# Altium PCB main_robot_mpu.PcbDoc
Units mil, origin at the board's own origin, x right, y up, seen from the top; angles counter-clockwise.
Board outline 2215 x 1568 mil, 2 copper layers (Top Layer, Bottom Layer); 88 components, 90 nets, 351 pads, 92 vias.
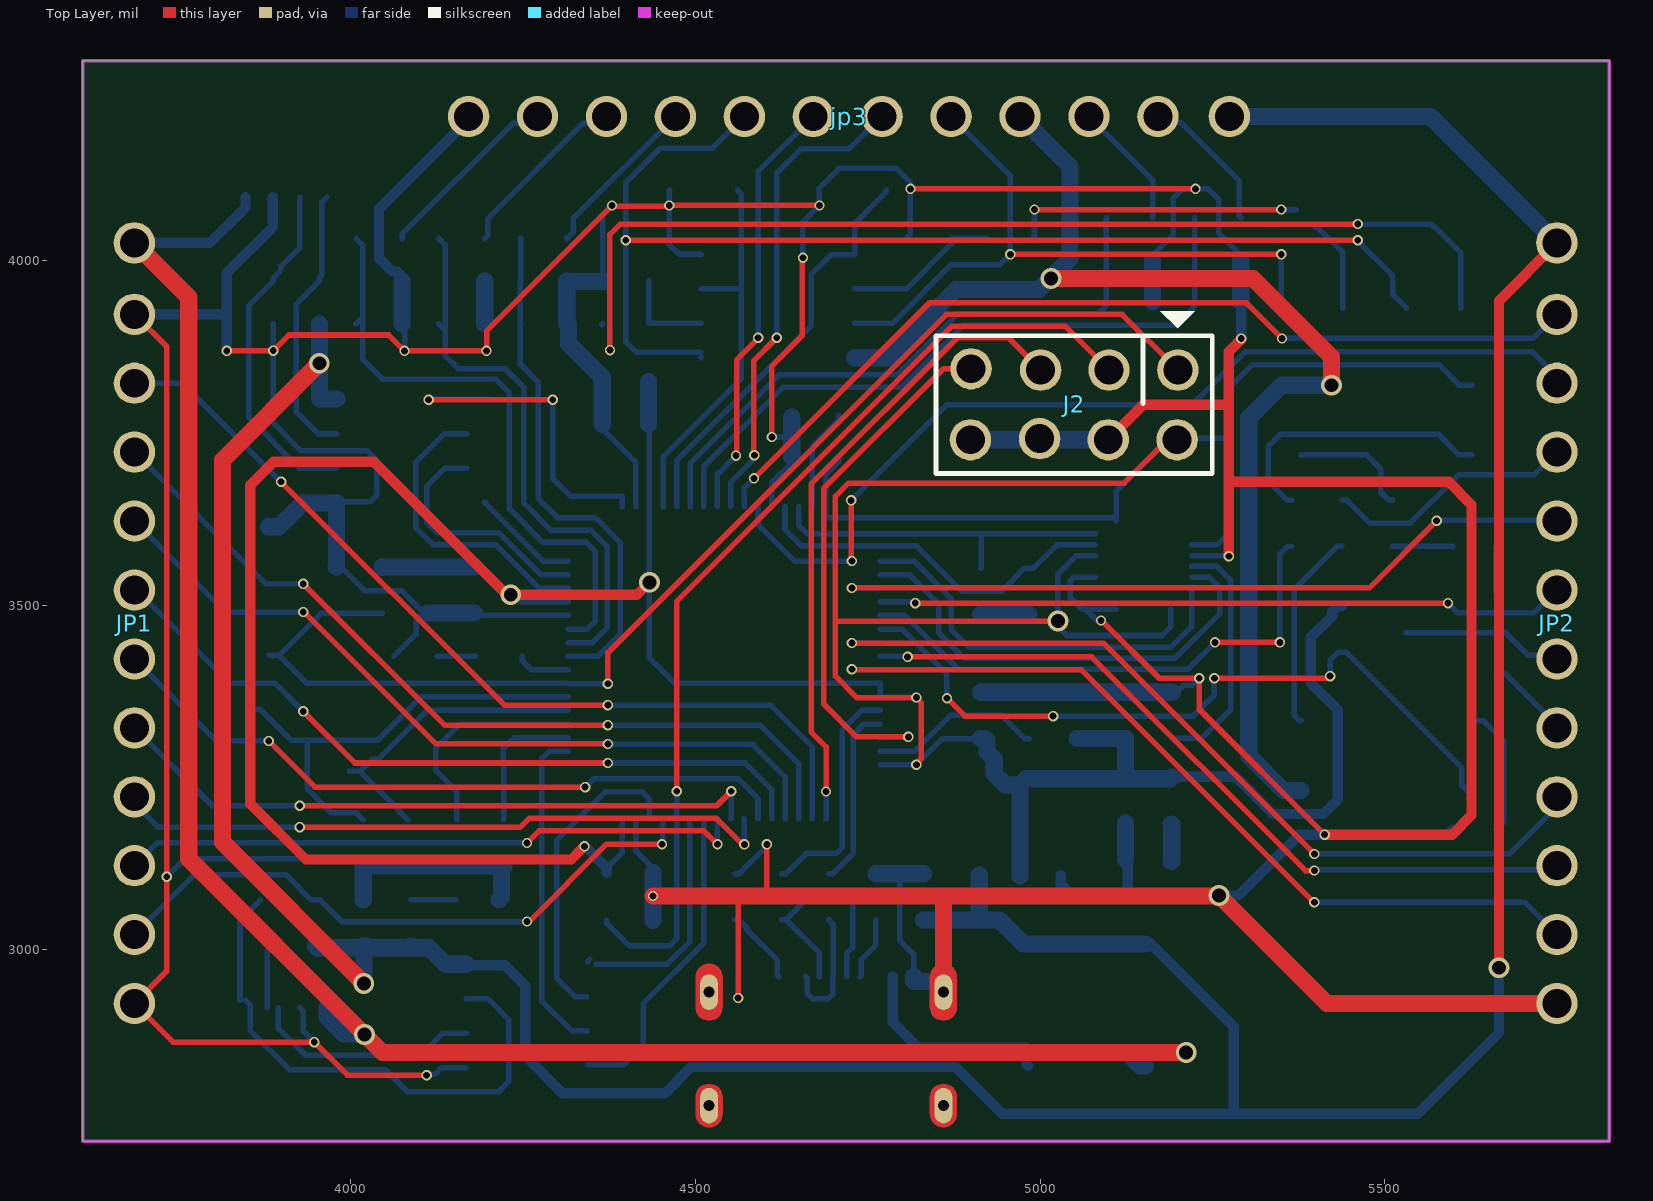
[diagram p0: Top Layer view]
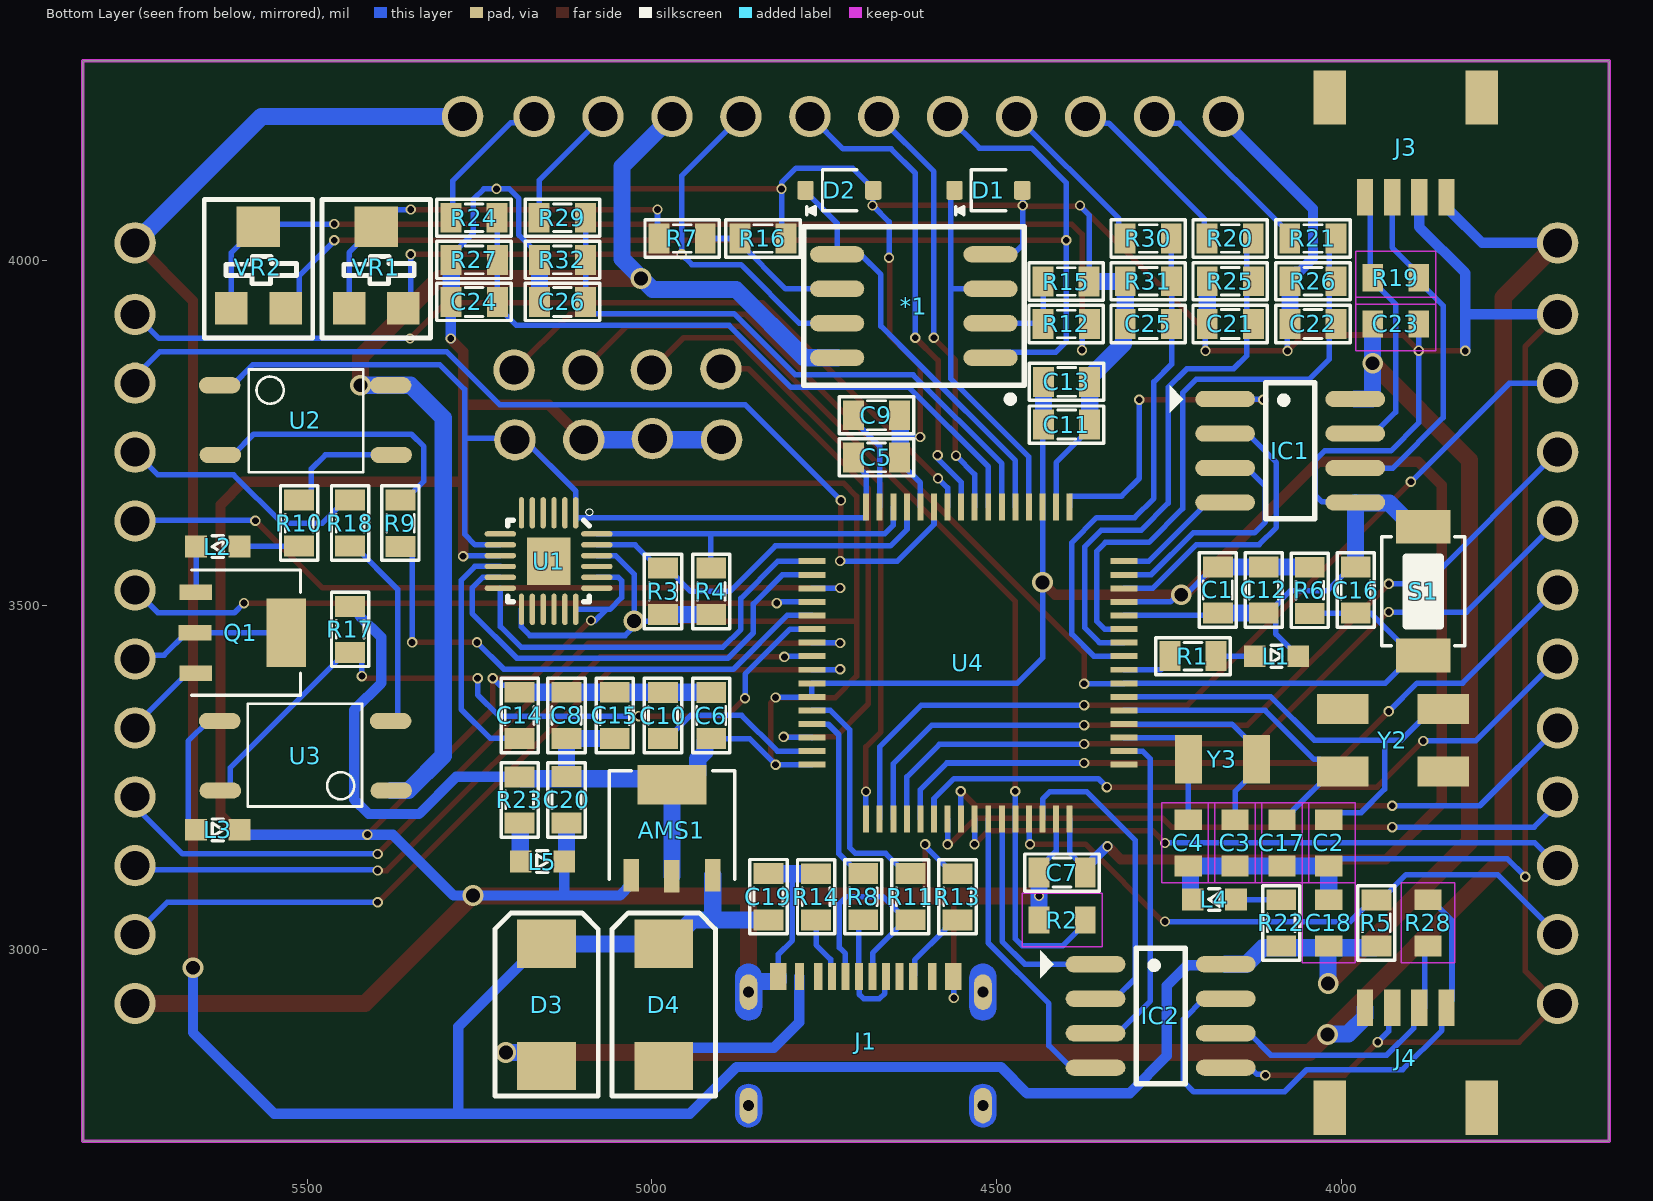
[diagram p1: Bottom Layer view, seen from below]
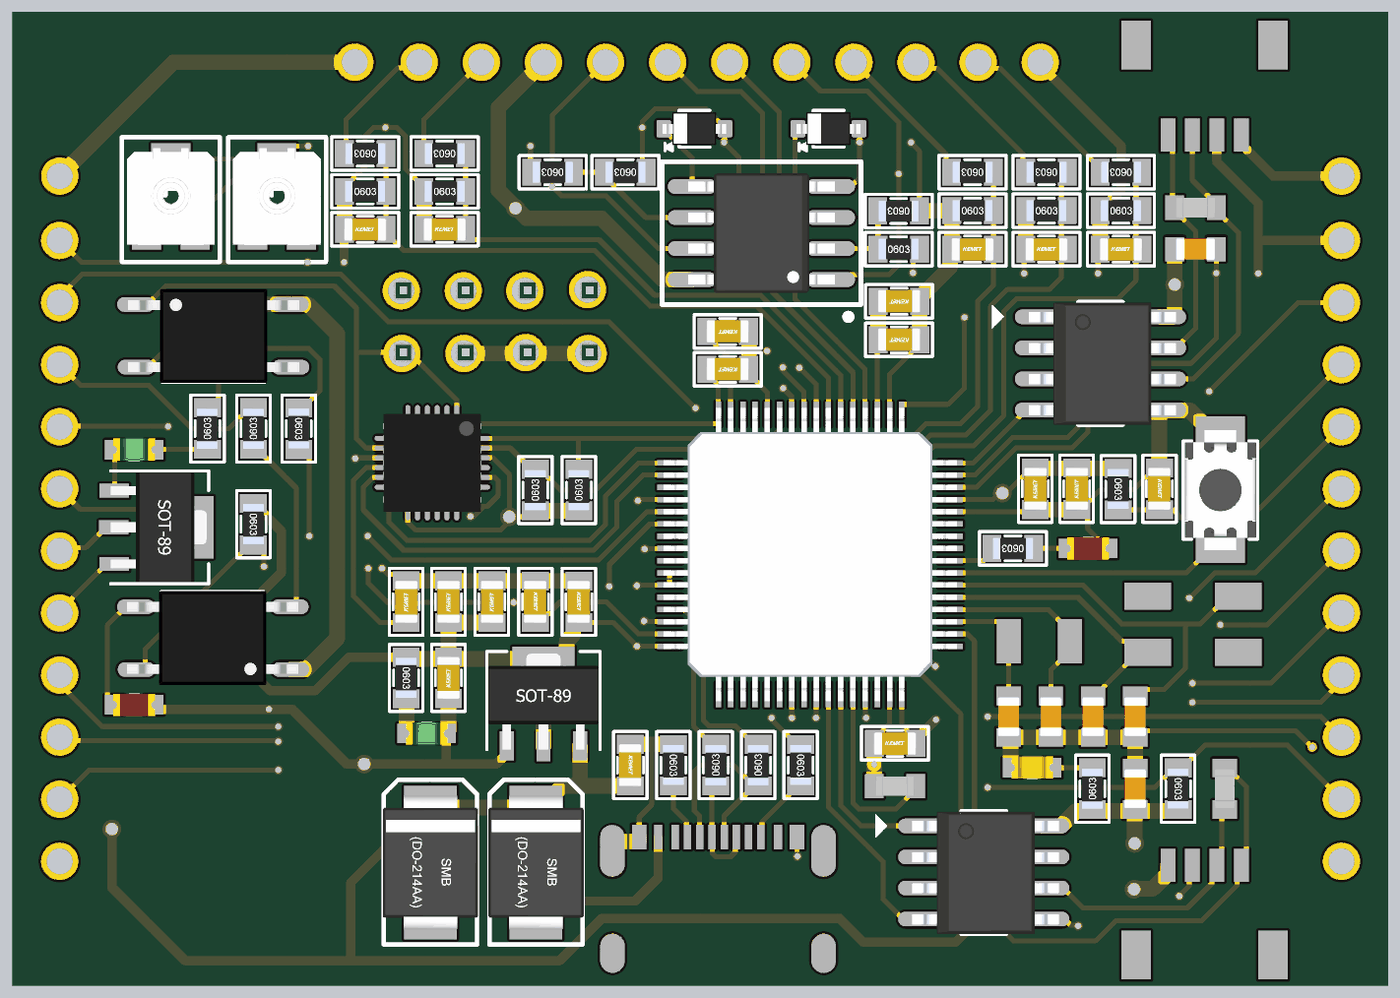
[diagram p2: 3D render of the assembled board from below, using the file's embedded part models]

## Layer stack, top to bottom
Top Solder: solder mask 0.4, Solder Resist, Dk 3.5
Top Layer: signal copper 1.4
Dielectric 1: dielectric 12.6, FR-4, Dk 4.8
Bottom Layer: signal copper 1.4
Bottom Solder: solder mask 0.4, Solder Resist, Dk 3.5

## Board outline
3611,2722 3611,4290 5826,4290 5826,2722

## Design rules (kind name [scope] priority, off if disabled: settings)
Clearance [All] p1: gap=7 ignorepadtopadclearanceinfootprint=FALSE
PolygonConnect [All] p1: connectstyle=Relief reliefconductorwidth=10 reliefentries=4 polygonreliefangle="90 Angle" airgapwidth=10
RoomDefinition main_robot_mpu [InComponentClass('main_robot_mpu')] p1: confinementstyle=ConfineIn formatcopy=TRUE lockcomponents=FALSE outline 0,0 2000,0 2000,1000 0,1000
RoutingVias [All] p1: holewidth=10 width=15 viastyle="Through Hole" minholewidth=10 minwidth=15 maxholewidth=10 maxwidth=15
SolderMaskExpansion [All] p1: expansion=4 istentingtop=FALSE
Width [All] p1: maxlimit=25 minlimit=8 preferedwidth=15
30 further rules are at their usual default settings.

## Components (designator, comment, footprint, x,y, rotation, side; value= is the part's Value field where it differs from the comment)
*1 "LM2904D" "SOIC 8" 4620,3934 r0 bottom
AMS1 "AMS1117" SOT89 4966,3185 r180 bottom
C1 "0.1uF" CAP_SMD0603 4177,3521 r90 bottom
C2 "22pF" 0603-CAP 4018,3155 r90 bottom
C3 "15pF" 0603-CAP 4154,3155 r90 bottom
C4 "15pF" 0603-CAP 4222,3155 r90 bottom
C5 "0.1uF" CAP_SMD0603 4673.29,3716.45 r0 bottom
C6 "0.1uF" CAP_SMD0603 4916,3341 r270 bottom
C7 "0.1uF" CAP_SMD0603 4406,3110 r180 bottom
C8 "0.1uF" CAP_SMD0603 5122,3339 r90 bottom
C9 "2.2uF" CAP_SMD0603 4673.29,3777.45 r0 bottom
C10 "2.2uF" CAP_SMD0603 4986,3341 r270 bottom
C11 "0.1uF" CAP_SMD0603 4397.3,3764 r0 bottom
C12 "0.1uF" CAP_SMD0603 4110.33,3521 r90 bottom
C13 "0.1uF" CAP_SMD0603 4397.3,3826 r0 bottom
C14 "0.1uF" CAP_SMD0603 5190,3339 r90 bottom
C15 "0.1uF" CAP_SMD0603 5052,3339 r90 bottom
C16 "0.1uF" CAP_SMD0603 3981,3523 r270 bottom
C17 "22pF" 0603-CAP 4086,3155 r90 bottom
C18 "0.1uF" 0603-CAP 4018,3039 r270 bottom
C19 "0.1uF" CAP_SMD0603 4833,3078 r270 bottom
C20 "0.1uF" CAP_SMD0603 5122,3216.49 r90 bottom
C21 "0.1uF" CAP_SMD0603 4162,3906 r180 bottom
C22 "0.1uF" CAP_SMD0603 4042,3906 r180 bottom
C23 "0.1uF" 0603-CAP 3921,3908 r0 bottom
C24 "0.1uF" CAP_SMD0603 5259,3938 r180 bottom
C25 "0.1uF" CAP_SMD0603 4281,3906 r180 bottom
C26 "0.1uF" CAP_SMD0603 5131,3938 r180 bottom
D1 "3.3V" SOD323 4512,4102 r180 bottom
D2 "3.3V" SOD323 4728,4102 r180 bottom
D3 "SS54" SMB 5153,2920 r90 bottom
D4 "SS54" SMB 4983,2920 r90 bottom
IC1 "MAX485" SO-8 4074,3724 r180 bottom
IC2 "MAX485" SO-8 4262,2904 r180 bottom
J1 "USB_C_2-LAYER_PADS" USB-C-16P-2LAYER-PADS 4689.83,2974.54 r180 bottom
J2 "Connector 4x2" JP4x2 5049.5,3791.5 r180 top
J3 "QWIIC_RA" JST04_1MM_RA 3906.31,4092 r0 bottom
J4 "QWIIC_RA" JST04_1MM_RA 3906.31,2915.69 r180 bottom
JP1 "jumper 12p 2.54mm" "jumper 12p 2.54mm" 3686,3822 r270 top (schematic designator jp1)
JP2 "jumper 12p 2.54mm" "jumper 12p 2.54mm" 5750,3822 r270 top (schematic designator jp2)
jp3 "jumper 12p 2.54mm" "jumper 12p 2.54mm" 5071,4209 r180 top
L1 "Red" LED_RED_SMD_0603 4094,3426 r180 bottom
L2 "LED" LED_GREEN_SMD_0603 5630,3585 r0 bottom
L3 "LED" LED_RED_SMD_0603 5630,3174 r180 bottom
L4 "Red" LED_YELLOW_SMD_0603 4184,3073 r0 bottom
L5 "Red" LED_GREEN_SMD_0603 5159,3128 r180 bottom
Q1 "D882" SOT89 5585,3455 r270 bottom
R1 "1k" RES_SMD0603 4214,3428 r0 bottom
R2 "10K" 0603-RES 4405,3043 r180 bottom
R3 "4.7k" RES_SMD0603 4982,3519 r90 bottom
R4 "4.7k" RES_SMD0603 4912,3519 r90 bottom
R5 "4k7" RES_SMD0603 3951,3040 r270 bottom
R6 "4.7k" RES_SMD0603 4047.67,3522.63 r270 bottom
R7 "2k" RES_SMD0603 4955.1,4034 r0 bottom
R8 "22" RES_SMD0603 4691.5,3075.95 r90 bottom
R9 "1k" RES_SMD0603 5367,3620 r270 bottom
R10 "4K7" RES_SMD0603 5510,3618 r90 bottom
R11 "22" RES_SMD0603 4623.17,3075.95 r90 bottom
R12 "2k" RES_SMD0603 4400,3906 r180 bottom
R13 "5.1k" RES_SMD0603 4558.83,3077.95 r270 bottom
R14 "5.1k" RES_SMD0603 4763.83,3077.95 r270 bottom
R15 "1k" RES_SMD0603 4398,3971.5 r0 bottom
R16 "1k" RES_SMD0603 4837.97,4034 r0 bottom
R17 "1k" RES_SMD0603 5440,3466 r270 bottom
R18 "4k7" RES_SMD0603 5436,3618 r90 bottom
R19 "120R" 0603-RES 3921,3975 r0 bottom
R20 "2k" RES_SMD0603 4160,4034 r0 bottom
R21 "2k" RES_SMD0603 4040,4034 r0 bottom
R22 "1k" RES_SMD0603 4085,3038 r90 bottom
R23 "1k" RES_SMD0603 5194,3218.49 r270 bottom
R24 "?k" RES_SMD0603 5257,4064 r0 bottom
R25 "1k" RES_SMD0603 4162,3968 r180 bottom
R26 "1k" RES_SMD0603 4042,3968 r180 bottom
R27 "?k" RES_SMD0603 5259,3999 r180 bottom
R28 "120R" 0603-RES 3874,3039 r90 bottom
R29 "2k" RES_SMD0603 5129,4064 r0 bottom
R30 "2k" RES_SMD0603 4279,4034 r0 bottom
R31 "1k" RES_SMD0603 4281,3968 r180 bottom
R32 "1k" RES_SMD0603 5131,3999 r180 bottom
S1 "PTS636_SM43J_SMTR_LFS" BUTTON_3x4 3881,3520 r270 bottom
U1 "MPU-9250" QFN-24 5149,3563 r270 bottom
U2 "OPTO" SOP4 5501,3770 r180 bottom
U3 "OPTO" SOP4 5504.6,3280 r0 bottom
U4 "STM32F405RGT6" TQFP64 4541.62,3416.16 r90 bottom
VR1 "100" "VR - SMD" 5439.37,3930.89 r180 bottom
VR2 "10K" "VR - SMD" 5610.37,3930.89 r180 bottom
Y2 "12MHz" CRYSTAL-SMD-5X3.2-4PAD 3925,3304 r180 bottom
Y3 "32.768kHz" CRYSTAL-SMD-3.2X1.5MM 4172.33,3276.5 r0 bottom

## Footprints (in the part's own frame and the unit in brackets; to place one, negate y for a bottom-side part, rotate by r counter-clockwise, add the part's x,y. Pads: shape width x height; smd on the part's side, far side on the other; paste and mask are expansions set on the pad)
0603-CAP [mil] "0603-CAP"
  rect 30x39.37 smd: 1(-33.46,0) 2(33.46,0)
  Top Layer keep-out lines w2: -57.99,-38.7 57.99,-38.7 57.99,38.7 -57.99,38.7 -57.99,-38.7
  body extent -31,-18 31,18, height 31
0603-RES [mil] "0603-RES"
  rect 30x39.37 smd: 1(-33.46,0) 2(33.46,0)
  Top Layer keep-out lines w2: 57.99,-38.7 57.99,38.7 -57.99,38.7 -57.99,-38.7 57.99,-38.7
  body extent -31,-16 31,16, height 16
BUTTON_3x4 [mm]
  rect 1.25x2 smd: 1(-2.382,0) 2(2.357,0)
  silkscreen extent -2.01,-1.52 2.01,1.52, body extent -2.45,-1.45 2.45,1.45, height 2
CAP_SMD0603 [mm]
  rect 0.771x1.1 smd: 1(-0.822,0.051) 2(0.88,0.051)
  silkscreen extent -1.35,-0.63 1.4,0.74, body extent -0.85,-0.43 0.9,0.52, height 0.88
CRYSTAL-SMD-3.2X1.5MM [mm] "CRYSTAL-SMD-3.2X1.5MM"
  rect 1x1.8 smd: 1(-1.25,0) 2(1.25,0)
CRYSTAL-SMD-5X3.2-4PAD [mil] "CRYSTAL-SMD-5X3.2-4PAD"
  rect 74.8x43.31 smd: 1(-72.83,-45.28) 2(72.83,-45.28) 3(72.83,45.28) 4(-72.83,45.28)
JP4x2 [mil] "Connector 4x2"
  round 60 hole 42: 1(-150.5,-49.5) 2(-50.5,-49.5) 3(48.5,-49.5) 4(149.5,-51.5) 5(-149.5,51.5) 6(-49.5,51.5) 7(50,50) 8(150.5,51.5)
  silkscreen extent -200,-135 200,101, body extent -197,-100 203,100, height 335
JST04_1MM_RA [mm] "JST04_1MM_RA"
  rect 0.6x1.35 smd: 1(-1.5,0) 2(-0.5,0) 3(0.5,0) 4(1.5,0)
  rect 1.2x2 smd: NC1(2.8,-3.675) NC2(-2.8,-3.675)
"jumper 12p 2.54mm" [mil] "jp 12p 2.54mm"
  round 60 hole 42: 1(-203.72,-0.14) 2(-100,0) 3(0,0) 4(100,0) 5(200,0) 6(300,0) 7(400,0) 8(500,0) 9(600,0) 10(700,0) 11(800,0) 12(900,0)
LED_GREEN_SMD_0603 [mm]
  rect 0.8x0.8 smd: 1(-0.8,0) 2(0.8,0)
  silkscreen extent -0.2,-0.4 0.2,0.4, body extent -0.85,-0.45 0.85,0.45, height 0.88
LED_RED_SMD_0603 [mm]
  rect 0.8x0.8 smd: 1(-0.8,0) 2(0.8,0)
  silkscreen extent -0.2,-0.4 0.2,0.4, body extent -0.85,-0.45 0.85,0.45, height 0.88
LED_YELLOW_SMD_0603 [mm]
  rect 0.8x0.8 smd: 1(-0.8,0) 2(0.8,0)
  silkscreen extent -0.2,-0.4 0.2,0.4, body extent -0.85,-0.45 0.85,0.45, height 0.9
QFN-24 [mm]
  oval 1.157x0.2 smd: 1(-1.804,0.975) 2(-1.804,0.575) 3(-1.804,0.175) 4(-1.804,-0.225) 5(-1.804,-0.625) 6(-1.804,-1.025) 13(1.753,-1.025) 14(1.753,-0.625) 15(1.753,-0.225) 16(1.753,0.175) 17(1.753,0.575) 18(1.753,0.975)
  oval 0.2x1.157 smd: 7(-1.025,-1.804) 8(-0.625,-1.804) 9(-0.225,-1.804) 10(0.175,-1.804) 11(0.575,-1.804) 12(0.975,-1.804) 19(0.975,1.753) 20(0.575,1.753) 21(0.175,1.753) 22(-0.225,1.753) 23(-0.625,1.753) 24(-1.025,1.753)
  rect 1.75x1.6 smd: 25(-0.025,-0.025)
  silkscreen extent -1.95,-1.53 1.47,1.6, body extent -2.04,-2.04 1.98,1.98, height 1
RES_SMD0603 [mm]
  rect 0.771x1.1 smd: 1(-0.822,0.051) 2(0.88,0.051)
  silkscreen extent -1.35,-0.64 1.4,0.74, body extent -0.8,-0.37 0.84,0.48, height 0.46
SMB [mil]
  rect 70x85 smd: 1(-88.58,0) 2(88.58,0)
  silkscreen extent -132,-75 134,75, body extent -108,-77 108,77, height 96
SO-8 [mm] "8-Pin Small Outline Integrated Circuit 1.27 mm Pitch, IPC Medium Density"
  oval 2.2x0.6 smd: 1(-2.4,1.905) 2(-2.4,0.635) 3(-2.4,-0.635) 4(-2.4,-1.905) 5(2.4,-1.905) 6(2.4,-0.635) 7(2.4,0.635) 8(2.4,1.905)
  silkscreen extent -4.44,-2.5 0.9,2.5, body extent -2.93,-2.51 3.08,2.49, height 1.75
SOD323 [mm] "SOD-323; 2 Leads; Body 1.8 x 1.35 mm, (LxW)"
  round 0.508 on Mech15: 0(0,0)
  rrect25% 0.6x0.7 smd: A(1.25,0) K(-1.25,0)
  silkscreen extent -1.2,-0.9 0.64,0.75, body extent -1.3,-0.68 1.3,0.67, height 1.1
"SOIC 8" [mm] "SOIC, 8-Leads, Body 4.90x3.90mm, Pitch 1.27mm, IPC Medium Density"
  oval 2x0.6 smd: 1(-2.827,1.905) 2(-2.827,0.635) 3(-2.827,-0.635) 4(-2.827,-1.905) 5(2.827,-1.905) 6(2.827,-0.635) 7(2.827,0.635) 8(2.827,1.905)
  silkscreen extent -4.06,-2.92 4.06,3.55, body extent -3,-2.45 3,2.45, height 1.7
SOP4 [mil] "SOIC, 8-Leads, Body 4.90x3.90mm, Pitch 1.27mm, IPC Medium Density"
  oval 60.24x23.62 smd: 1(-126.3,49) 2(-125.3,-52) 3(122.7,-52) 4(121.7,49)
  silkscreen extent -84,-77 82,72, body extent -139,-78 137,74, height 87
SOT89 [mil]
  rect 22.46x47.24 smd: 1(-64,-77) 2(-5,-78) 3(54,-77)
  rect 100x57.24 smd: 2(-5,54.21)
  silkscreen extent -96,-83 86,75, body extent -94,-83 84,72, height 56
TQFP64 [mm] "TQFP64"
  rect 0.22x1 smd: 1(-3.75,-5.75) 2(-3.25,-5.75) 3(-2.75,-5.75) 4(-2.25,-5.75) 5(-1.75,-5.75) 6(-1.25,-5.75) 7(-0.75,-5.75) 8(-0.25,-5.75) 9(0.25,-5.75) 10(0.75,-5.75) 11(1.25,-5.75) 12(1.75,-5.75) 13(2.25,-5.75) 14(2.75,-5.75) 15(3.25,-5.75) 16(3.75,-5.75) 33(3.75,5.75) 34(3.25,5.75) 35(2.75,5.75) 36(2.25,5.75) 37(1.75,5.75) 38(1.25,5.75) 39(0.75,5.75) 40(0.25,5.75) 41(-0.25,5.75) 42(-0.75,5.75) 43(-1.25,5.75) 44(-1.75,5.75) 45(-2.25,5.75) 46(-2.75,5.75) 47(-3.25,5.75) 48(-3.75,5.75)
  rect 1x0.22 smd: 17(5.75,-3.75) 18(5.75,-3.25) 19(5.75,-2.75) 20(5.75,-2.25) 21(5.75,-1.75) 22(5.75,-1.25) 23(5.75,-0.75) 24(5.75,-0.25) 25(5.75,0.25) 26(5.75,0.75) 27(5.75,1.25) 28(5.75,1.75) 29(5.75,2.25) 30(5.75,2.75) 31(5.75,3.25) 32(5.75,3.75) 49(-5.75,3.75) 50(-5.75,3.25) 51(-5.75,2.75) 52(-5.75,2.25) 53(-5.75,1.75) 54(-5.75,1.25) 55(-5.75,0.75) 56(-5.75,0.25) 57(-5.75,-0.25) 58(-5.75,-0.75) 59(-5.75,-1.25) 60(-5.75,-1.75) 61(-5.75,-2.25) 62(-5.75,-2.75) 63(-5.75,-3.25) 64(-5.75,-3.75)
  body extent -6,-6 6,6, height 1.56
USB-C-16P-2LAYER-PADS [mm] "USB-C-16P-2LAYER-PADS"
  rect 0.3x1 smd: A5(-1.25,-0.34) A6(-0.25,-0.34) A7(0.25,-0.34) A8(1.25,-0.34) B5(1.75,-0.34) B6(0.75,-0.34) B7(-0.75,-0.34) B8(-1.75,-0.34)
  rect 0.6x1 smd: GND(-3.225,-0.34) GND(3.225,-0.34)
  oval 0.654x1.308 / inner oval 0.705x1.41 / far side oval 0.654x1.308 hole 0.4: SHLD1(-4.318,-0.915) SHLD2(4.318,-0.915) SHLD3(-4.318,-5.095) SHLD4(4.318,-5.095)
  rect 0.33x1 smd: VBUS1(-2.45,-0.34) VBUS2(2.45,-0.34)
  Top Layer region: -3.818,-0.365 -3.818,-1.465 -3.856,-1.656 -3.965,-1.819 -4.127,-1.927 -4.318,-1.965 -4.318,-1.965 -4.568,-1.898 -4.751,-1.715 -4.818,-1.465 -4.818,-1.465 -4.818,-0.365 -4.78,-0.174 -4.672,-0.011 -4.509,0.097 -4.318,0.135 -4.318,0.135 -4.127,0.097 -3.964,-0.011 -3.856,-0.174 -3.818,-0.365
  Top Layer region: 4.818,-0.365 4.818,-1.465 4.78,-1.656 4.672,-1.819 4.509,-1.927 4.318,-1.965 4.318,-1.965 4.127,-1.927 3.965,-1.819 3.856,-1.656 3.818,-1.465 3.818,-1.465 3.818,-0.365 3.856,-0.174 3.964,-0.011 4.127,0.097 4.318,0.135 4.318,0.135 4.509,0.097 4.672,-0.011 4.78,-0.174 4.818,-0.365
  Top Layer region: -4.318,-5.895 -4.509,-5.857 -4.672,-5.749 -4.78,-5.586 -4.818,-5.395 -4.818,-5.395 -4.818,-4.795 -4.78,-4.604 -4.672,-4.441 -4.509,-4.333 -4.318,-4.295 -4.318,-4.295 -4.127,-4.333 -3.964,-4.441 -3.856,-4.604 -3.818,-4.795 -3.818,-4.795 -3.818,-5.395 -3.856,-5.586 -3.964,-5.749 -4.127,-5.857 -4.318,-5.895
  Top Layer region: 4.818,-4.795 4.818,-5.395 4.78,-5.586 4.672,-5.749 4.509,-5.857 4.318,-5.895 4.318,-5.895 4.127,-5.857 3.964,-5.749 3.856,-5.586 3.818,-5.395 3.818,-5.395 3.818,-4.795 3.856,-4.604 3.964,-4.441 4.127,-4.333 4.318,-4.295 4.318,-4.295 4.509,-4.333 4.672,-4.441 4.78,-4.604 4.818,-4.795
  Bottom Layer region: -4.818,-0.365 -4.818,-1.465 -4.751,-1.715 -4.568,-1.898 -4.318,-1.965 -4.318,-1.965 -4.127,-1.927 -3.965,-1.819 -3.856,-1.656 -3.818,-1.465 -3.818,-1.465 -3.818,-0.365 -3.856,-0.174 -3.964,-0.011 -4.127,0.097 -4.318,0.135 -4.318,0.135 -4.509,0.097 -4.672,-0.011 -4.78,-0.174 -4.818,-0.365
  Bottom Layer region: 3.818,-0.365 3.818,-1.465 3.856,-1.656 3.965,-1.819 4.127,-1.927 4.318,-1.965 4.318,-1.965 4.509,-1.927 4.672,-1.819 4.78,-1.656 4.818,-1.465 4.818,-1.465 4.818,-0.365 4.78,-0.174 4.672,-0.011 4.509,0.097 4.318,0.135 4.318,0.135 4.127,0.097 3.964,-0.011 3.856,-0.174 3.818,-0.365
  Bottom Layer region: -4.818,-4.795 -4.818,-5.395 -4.78,-5.586 -4.672,-5.749 -4.509,-5.857 -4.318,-5.895 -4.318,-5.895 -4.127,-5.857 -3.964,-5.749 -3.856,-5.586 -3.818,-5.395 -3.818,-5.395 -3.818,-4.795 -3.856,-4.604 -3.964,-4.441 -4.127,-4.333 -4.318,-4.295 -4.318,-4.295 -4.509,-4.333 -4.672,-4.441 -4.78,-4.604 -4.818,-4.795
  Bottom Layer region: 4.318,-5.895 4.509,-5.857 4.672,-5.749 4.78,-5.586 4.818,-5.395 4.818,-5.395 4.818,-4.795 4.78,-4.604 4.672,-4.441 4.509,-4.333 4.318,-4.295 4.318,-4.295 4.127,-4.333 3.964,-4.441 3.856,-4.604 3.818,-4.795 3.818,-4.795 3.818,-5.395 3.856,-5.586 3.964,-5.749 4.127,-5.857 4.318,-5.895
"VR - SMD" [mm] "Resistor Variable"
  rect 1.2x1.2 smd: 1(0,0) 3(2,0)
  rect 1.6x1.5 smd: 2(1,3)
  silkscreen extent -1,-1.1 3,4, body extent -0.8,-0.41 2.8,3.55, height 1.13

## Part data
C1 C5 C6 C7 C8 C9 C10 C11 C12 C13 C14 C15 C16 C19 C20 C21 C22 C24 C25 C26: library part Cap
C2 C3 C4 C17 C18 C23: library part CAP0603-CAP, "CapacitorStandard 0603 ceramic capacitor, and 0.1\" leaded capacitor.", DeviceName=0603-CAP, DeviceSetName=CAP, GateName_1=G$1, LibraryName=SparkFun, SymbolName_1=CAP
D1 D2: library part DIODE_ZENER_3V3_SOD323, "Diode Zener SMD 3.3V 200mW SOD-323", Manufacturer 1="ON Semiconductor", Manufacturer Part Number 1=MM3Z3V3ST1G, Package / Case=SOD-323, Ratings="3.3V; 0.2W; Vf=900mV @ 10mA", Supplier Part Number 1=MM3Z3V3ST1GOSCT-ND, Tolerance=±3%, Diode Type=Zener, Material=Si, SCDType=source, Supplier 1=Digi-Key
D3 D4: library part DIODE
IC1 IC2: "RS232 - RS485 (Same sn75176)"
J1: "USB Type C 16Pin Connector Super Speed pins not available on the 16-pin purely SMD connector so this part is best for USB 2.0 implementations. D1 and D2 are tied together enabling D+/- no matter which way the cable is plugged into the connector. The two channel configuration pins (CC1/2) are exposed. These are normally connected to ground via 5.1k resistors but can be reconfigured for high current/high power applications.", DeviceName=_2-LAYER_PADS, DeviceSetName=USB_C, GateName_1=J1, LibraryName=SparkFun-Connectors, PROD_ID=CONN-14122, SymbolName_1=USB-C-MINIMUM, USB-C=USB-C
J2: library part JP4x2
J3 J4: library part QWIIC_CONNECTORJS-1MM, "SparkFun I2C Standard Qwiic Connector An SMD 1mm pitch JST connector makes it easy and quick (get it? Qwiic?) to connect I2C devices to each other. The Qwiic system enables fast and solderless connection between popular platforms and various sensors and actuators.   We carry 200mm, 100mm, 50mm, and breadboard friendly Qwiic cables. We also offer 10 pcs strips the SMD connectors.", DeviceName=JS-1MM, DeviceSetName=QWIIC_CONNECTOR, GateName_1=G$1, LibraryName=SparkFun-Connectors, PROD_ID=CONN-13694, SymbolName_1=I2C_STANDARD
JP1 JP2 jp3: "jp 12p 2.54mm"
L1 L4 L5: library part LED, "Lighting Eminter Diode"
L2 L3: "Lighting Eminter Diode"
Q1: library part "Tranzitor NPN"
R1 R3 R4 R5 R6 R7 R8 R9 R10 R11 R12 R13 R14 R15 R16 R17 R18 R20 R21 R22 R23 R24 R25 R26 R27 R29 R30 R31 R32: library part Resistor
R2 R19 R28: library part RESISTOR0603-RES, "ResistorBasic schematic elements and footprints for 0603, 1206, and PTH resistors.", DeviceName=0603-RES, DeviceSetName=RESISTOR, GateName_1=G$1, LibraryName=SparkFun, SymbolName_1=RESISTOR
S1: "Tactile Switch SPST-NO Top Actuated Surface Mount", Package=None, Availability=Unavailable, MF=C&K, MP="PTS636 SM43J SMTR LFS", Price=None, SnapEDA_Link=https://www.snapeda.com/parts/PTS636%20SM43J%20SMTR%20LFS/C%26K/view-part/4478349/?ref=snap
U1: "9-axis MotionTracking: 3-Axis gyroscope, 3-Axis accelerometer, 3-Axis magnetometer NC pin 19. 2-6 & 14-17 not internally connected. May be used for PCB trace routing.", DeviceSetName=MPU-9250, GateName_1=G$1, LibraryName=9dof-devboard-temp, PROD_ID=IC-13192, SymbolName_1=MPU-9250
U4: library part STM32F405RG, "STM32F405RGT6    ARM DSP Chip used on the WAV Trigger board. IC MCU 32BIT 1MB FLASH 64LQFP   Datasheet SparkFun Products  WAV Trigger (WIG-13660)", DeviceSetName=STM32F405RG, GateName_1=G$1, LibraryName=STM32_Temp, PROD_ID=IC-11709, SymbolName_1=STM32F405RG
VR1 VR2: library part VR, "Var Resistor RM065", RM065-103=1K, RM065-104=10K, RM065-503=5K
Y2 Y3: library part "CRYSTAL-12MHZ\"", "12.0MHz Crystal  Frequency: 12.0MHz  Frequency Tolerance: &plusmn;20ppm  Load Capacitance: 18pF       SparkFun Products: SparkFun Logomatic  Pocket AVR Programmer", 1=1, 2=2, DeviceName="\"", DeviceSetName=CRYSTAL-12MHZ, GateName_1=G$1, LibraryName=SparkFun-Clocks, PROD_ID=XTAL-08297, SymbolName_1=CRYSTAL

## Via types
v1: diameter 15, hole 10, Top Layer to Bottom Layer, tented both sides, 78 vias
v2: diameter 30, hole 20, Top Layer to Bottom Layer, tented both sides, 11 vias
v3: diameter 15, hole 10, Top Layer to Bottom Layer, 3 vias

## Nets (pads, with @x,y where several pads share a name; then routed paths per layer and width w, separated by ;. In a path a pad name is that pad's centre, name@x,y a point inside that pad or via, vN(x,y) a via of type N, cw(c..) or ccw(c..) an arc to the next point about the centre after c; other vN are vias at no path point)
3.3V: AMS1.2 C1.2 C5.2 C6.2 C7.2 C8.1 C11.2 C12.2 C13.2 C15.1 C20.2 J2.5 R3.1 R4.1 R6.1 R17.1 R23.1 U1.1 U1.8 U1.13 U1.22 U2.1 U4.13 U4.19 U4.32 U4.42 U4.43 U4.48 U4.64 | length 7465.4
  Top Layer w8: 4704,3477 v2(5026,3477) ; v1(4820.52,3268.52) 4820.52,3270.41 4828,3277.89 4828,3357.81 4820.52,3365.29 v1(4820.52,3366) 4734,3366 4703,3397 4703,3658 4722,3677 5122,3677 5185,3740 J2.5
  Top Layer w15: v1(4339,3150) 4320,3131 3935,3131 3854,3212 3854,3674 3888,3708 4033.09,3708 4226.09,3515 4236,3515 4415.26,3515 v2(4433.35,3533.1)
  Bottom Layer w8: C1.2 4185.46,3555.63 4226.09,3515 4237.43,3515 4247.69,3504.74 U4.13 ; C7.2@4371.37,3118.46 4393.98,3141.07 U4.64 ; C11.2 4433.35,3760.58 U4.19 v2(4433.35,3533.1) 4433.35,3423.65 4470.37,3386.63 U4.42 U4.43 4768.33,3366.62 4819.9,3366.62 v1(4820.52,3366) ; C5.2 4707.91,3707.99 4689.26,3689.34 U4.32 4689.26,3627.19 U1.1@5110.63,3627.19 ; U4.48 v1(4820.52,3268.52) 4858.37,3306.37 C6.2 ; R3.1 4993.62,3477 v2(5026,3477) ; U1.22 5052.87,3571.87 5026,3545 v2(5026,3477) ; U1.1@5110.63,3622.77 U1.1@5110.63,3627.19 ; U1.13 5189.37,3468.37 5177,3456 5039,3456 5026,3469 v2(5026,3477) ; U1.8 5256.62,3587.62 5272,3603 5272,3742 ; U2.1 5608.99,3819 5578.99,3849 5308,3849 5272,3813 5272,3742 ; U1.1@5110.63,3627.19 U1.1 5110.63,3665.63 5187,3742 5272,3742
  Bottom Layer w15: v1(4339,3150) 4339.84,3150 4371.37,3118.46 C7.2 ; R23.1 5284.14,3250.86 5338,3197 5411,3197 5432,3218 5432,3348 5393,3387 5393,3453.37 5423.85,3484.22 5423.85,3490.69 5431.54,3498.37 R17.1
  Bottom Layer w25: R6.1 4045.99,3555.31 4112.33,3555.31 4178.68,3555.31 C1.2 ; C11.2 C13.2 ; C6.2 4920.48,3306.37 4923.16,3303.69 4923.16,3287.05 4933.5,3276.71 4933.5,3255.34 4949.62,3239.21 AMS1.2@4971,3239.21 ; R4.1 R3.1 ; AMS1.2@4971,3107 AMS1.2@4971,3239.21 ; C15.1 C8.1 C20.2 ; R23.1 5189.32,3248.18 4979.97,3248.18 AMS1.2@4971,3239.21
  other v2: 4232,3515
+5VDC: D3.1 J3.1 J4.1 JP1.1 | length 2887.2
  Top Layer w25: JP1.1 3765,3946.57 3765,3132 v2(4020,2877) 4046,2851 v2(5212,2851)
  Bottom Layer w15: JP1.1 3795.73,4025.72 3842.94,4072.93 3847.25,4077.24 J3.1
  Bottom Layer w25: J4.1 3965.37,2902.31 3989.72,2877.96 4019.04,2877.96 v2(4020,2877) ; D3.1 5145.5,2831.42 5125.92,2851 v2(5212,2851)
+24VDC: *1.8 jp3.4 U2.4 U3.1 | length 1829.4
  Top Layer w25: v2(5016,3974) 5309,3974 5423,3860 v2(5423,3819)
  Bottom Layer w25: *1.8 4779,3859 4878,3958 4999,3958 5043.5,4002.5 5043.5,4136.5 jp3.4 ; U3.1 5353.37,3231 5303,3281.37 5303,3771.63 5350.37,3819 U2.4 v2(5423,3819)
A_CH1: IC2.6 J4.3 R28.1 | length 424.4
  Bottom Layer w8: J4.3@3878.62,2915.69 R28.1@3878.62,2998.92 ; R28.1@3880,3005.54 R28.1@3886.62,2998.92 ; J4.3@3894.62,2915.69 3894.62,2886.38 3934,2847 4102,2847 4134,2879 IC2.6
A_CH2: IC1.6 J3.3 R19.1 | length 508.4
  Bottom Layer w8: J3.3 3926,4019 3898.54,3991.54 3898.54,3986 R19.1 3887.54,3970.32 3852,3934.78 3852,3772 3925,3699 IC1.6
ADC1_int6: C26.2 R29.1 R32.2 U4.22 | length 889.5
  Bottom Layer w8: U4.22 4492.41,3705.41 4621,3834 4792,3834 4881,3923 5085.19,3923 5096.37,3934.19 C26.2 R32.2 5096.37,4061.76 R29.1
ADC1_int7: C24.2 R24.1 R27.2 U4.23 | length 995.7
  Bottom Layer w8: U4.23 4512.09,3701.09 4627,3816 4798,3816 4888,3906 5196.85,3906 5224.37,3933.53 C24.2 R27.2 5224.37,4061.76 R24.1
ADC1_int11: C25.2 R30.1 R31.2 U4.9 | length 755.4
  Bottom Layer w8: R30.1 4246.37,4031.76 R31.2 4246.12,3969.74 4246.12,3908.24 C25.2 4246.12,3907.74 4246.12,3849.54 4271.75,3823.92 4271.75,3654.92 4299.75,3626.92 4354.75,3626.92 4390.75,3590.92 4390.75,3457.92 4358.75,3425.92 4315.32,3425.92 U4.9
ADC1_int12: C21.2 R20.1 R25.2 U4.10 | length 819.2
  Bottom Layer w8: C21.2 C21.2@4137,3898.37 ; R20.1 4137,4022.63 4137,3969.99 C21.2@4137,3898.37 ; U4.10 4350.69,3445.69 4372,3467 4372,3585 4348,3609 4290,3609 4251,3648 4251,3816 4224,3843 4156,3843 4137,3862 C21.2@4137,3898.37
ADC1_int13: C22.2 R21.1 R26.2 U4.11 | length 890.1
  Bottom Layer w8: C22.2 C22.2@4017,3917.62 ; R21.1 4017,4022.63 4017,3969.99 C22.2@4017,3917.62 ; U4.11 4343.37,3465.37 4355,3477 4355,3578 4342,3591 4279,3591 4230,3640 4230,3808 4210,3828 4046,3828 4017,3857 C22.2@4017,3917.62
ADC_in1: jp3.10 R20.2 | length 264.1
  Bottom Layer w8: R20.2 4198.97,4036.35 4198.97,4060.97 4337.3,4199.3 4361.3,4199.3 jp3.10
ADC_in2: jp3.11 R21.2 | length 273.5
  Bottom Layer w8: R21.2 4074.63,4038.48 4235.2,4199.05 4261.05,4199.05 jp3.11
ADC_in3: jp3.9 R30.2 | length 242.2
  Bottom Layer w8: R30.2 4322.72,4041.1 4322.72,4060.72 jp3.9
ADC_in4: jp3.3 R29.2 | length 185.4
  Bottom Layer w8: jp3.3 5163.63,4116.37 R29.2
B_CH1: IC2.7 J4.4 R28.2 | length 786.3
  Bottom Layer w8: J4.4@3839.25,2927 3839.25,3042.4 3868.32,3071.46 R28.2@3868.32,3072.46 ; J4.4@3847.25,2927 3853.96,2920.29 3853.96,2883.04 3911,2826 4050,2826 4082,2794 4214,2794 4229,2809 4229,2899.01 4199.01,2929 IC2.7
B_CH2: IC1.7 J3.4 R19.2 | length 401.6
  Bottom Layer w8: J3.4 3958,4084.63 3958,3978.54 R19.2 3954.46,3970.32 3921,3936.86 3921,3780.24 3952.24,3749 IC1.7
Bat_read: jp3.2 R24.2 | length 211.6
  Bottom Layer w8: jp3.2 5180.2,4199.8 5205.2,4199.8 5289.03,4115.97 5289.03,4064.61 R24.2
BOOT0: J2.2 R2.2 U4.60 | length 1432.4
  Top Layer w8: v1(4473,3230) 4473,3472 4473,3506 4872,3905 5036,3905 J2.2
  Bottom Layer w8: R2.2 4371.54,3038.32 4382.54,3027.32 4403.86,3006 4462.99,3006 4472.72,3015.73 U4.60 4472.86,3189.92 4472.86,3229.86 v1(4473,3230)
bumper_front_back: JP2.5 U4.35 | length 1105.2
  Top Layer w8: v1(4727,3525) 5478,3525 v1(5575.5,3622.5)
  Bottom Layer w8: v1(4727,3525) 4727.29,3524.72 4767.72,3524.72 U4.35 ; v1(5575.5,3622.5) 5576,3623 5749,3623 JP2.5
bumper_left_right: JP2.6 U4.36 | length 1002.2
  Top Layer w8: v1(4819,3503) v1(5592,3503)
  Bottom Layer w8: U4.36 4815.37,3504.74 4817.11,3503 v1(4819,3503) ; v1(5592,3503) 5606,3489 5717,3489 JP2.6
D+: R8.2 U4.45 | length 265.4
  Bottom Layer w8: R8.2 4699.96,3110.57 4729,3139.61 4729,3312 4744.25,3327.25 4767.67,3327.25 U4.45
D-: R11.2 U4.44 | length 341
  Bottom Layer w8: R11.2 4631.63,3110.57 4661.06,3140 4705,3140 4713,3148 4713,3319 4741.26,3347.26 U4.44
DAC_OUT1: *1.1 jp3.8 VR2.3 | length 1748.3
  Top Layer w8: v1(4399,4029.42) 5460,4029.42 v1@5461,4028.42
  Bottom Layer w8: *1.1@4507.7,3860 *1.1 ; *1.1@4507.7,3867 4414,3867 4399,3882 v1(4399,4029.42) 4399,4113 4449,4163 4525,4163 jp3.8 ; v1@5461,4028.42 5512,3977.42 5512,3958 5512.01,3950.51 VR2.3
  other v1: 5461,4029.42
DAC_OUT1_MCU: *1.3 D1.K U4.20 | length 565.9
  Bottom Layer w8: U4.20 4453.04,3715.04 4566.2,3828.2 4566.2,3959 ; *1.3 4566.2,3959 ; D1.K 4566.2,4097.01 4566.2,3959
DAC_OUT2: *1.7 jp3.5 VR1.3 | length 974.3
  Top Layer w8: v1@4959,4009 v1(5350,4009)
  Bottom Layer w8: *1.7 4786,3909 4871,3994 4942,3994 v1(4957,4009) ; jp3.5 4957,4123 v1@4957,4011 ; v1(5350,4009) 5350,3941.52 VR1.3
DAC_OUT2_MCU: *1.5 D2.K U4.21 | length 605.5
  Bottom Layer w8: U4.21 4472.72,3709.72 4614,3851 4668,3905 4668,3979.75 4696.35,4008.1 4730.4,4008.1 *1.5 4731.3,4054.12 4777.21,4100.03 D2.K
DE_485_CH1: IC2.3 U4.2 | length 478
  Bottom Layer w8: U4.2 4288.21,3288.21 4277,3277 4277,2926 4320.39,2882.61 IC2.3@4343.09,2882.61
DE_485_CH2: IC1.3 U4.15 | length 357.8
  Bottom Layer w8: IC1.3 4136.99,3699 4110,3672.01 4110,3621 4126,3605 4215,3605 4275.89,3544.11 U4.15
driver_main_wheel: JP2.9 U4.39 | length 1233.6
  Top Layer w8: v1(4727,3445) 5092,3445 v1(5398,3139)
  Bottom Layer w8: v1(4727,3445) 4727.36,3445.36 4767.67,3445.36 U4.39 ; v1(5398,3139) 5681,3139 5750,3208 JP2.9
ds18b21: JP1.11 R5.1 U4.61 | length 913.4
  Top Layer w8: v1@4259,3041 4371.17,3153.17 v1(4451.49,3153.17)
  Bottom Layer w8: JP1.11 3773,3109 3905.91,3109 3942.54,3072.37 R5.1 3955.48,3072.37 3986.85,3041 v1@4259,3041 ; v1(4451.49,3153.17) 4452.71,3154.39 4452.71,3189.45 U4.61
  other v1: 4255.7,3041
EMG_btn: JP2.4 R18.2 | length 368.6
  Bottom Layer w8: R18.2 5444.46,3652.63 5478.09,3619 5537,3619 5607,3689 5717,3689 JP2.4
EMG_btn_MCU: R17.2 U3.4 U4.38 | length 1095.1
  Top Layer w8: v1(4865,3365) 4891,3339 v1(5019,3339) ; v1(5253,3394) 5416.11,3394 5419.11,3397 v1(5421,3397)
  Bottom Layer w8: U4.38 4799.63,3465.37 4865,3400 v1(4865,3365) ; v1(5019,3339) 5222,3339 5253,3370 v1(5253,3394) ; v1(5421,3397) 5421,3420.19 5432.19,3431.37 R17.2 5444.48,3431.37 5611.99,3263.86 5611.99,3238.22 5619.2,3231 U3.4
enable_motor: R9.2 U4.37 | length 777.1
  Top Layer w8: v1(5254,3446) v1@5256,3448 ; v1@5256,3446 v1(5348,3446)
  Bottom Layer w8: U4.37 4803.94,3485.06 4882,3407 5215,3407 v1(5254,3446) ; v1@5348,3448 5348,3574.19 5359.19,3585.37 R9.2
enable_motor_out: JP2.7 Q1.2 | length 235
  Bottom Layer w8: Q1.2@5530.79,3460 5663,3460 5675.39,3460 5708,3427.39 5744.61,3427.39 JP2.7
FSYNC: U1.11 U4.34 | length 679
  Bottom Layer w8: U4.34 4810.89,3544.11 4853,3502 4853,3460 4890,3423 5196,3423 5261,3488 5261,3525 5245.62,3540.38 U1.11
GND: *1.4 AMS1.1 C1.1 C2.1 C3.1 C4.1 C5.1 C6.1 C7.1 C8.2 C9.1 C10.1 C11.1 C12.1 C13.1 C14.2 C15.2 C16.1 C17.1 C18.1 C19.1 C20.1 C21.1 C22.1 C23.1 C24.1 C25.1 C26.1 D1.A D2.A IC1.5 IC2.5 J1.GND J1.SHLD1 J2.6 J2.7 J2.8 J3.2 J4.2 JP1.2 JP1.12 JP2.12 jp3.12 L1.2 L3.2 L4.2 L5.2 R2.1 R13.1 R14.1 R15.1 R16.1 R25.1 R26.1 R27.1 R31.1 R32.1 S1.1 U1.9 U1.18 U1.20 U4.12 U4.18 U4.28 U4.63 | length 13335
  Top Layer w8: JP1.2 3733,3875 v3(3733,3106) 3733,2969 JP1.12 3742,2866 v1(3947,2866) 3995,2818 v1(4110,2818) ; v1(3820,3869) 3820.15,3869.15 3887.39,3869.15 v1(3887.54,3869.3) 3910.24,3892 4055,3892 v1(4078,3869) ; v1@4081,3869 v1@4195,3869 ; v1(4197,3869) 4197,3898 v1(4379,4080) 4380,4079 v1@4462,4079 ; v1@4463,4080 v1@4679,4080 ; v1(4562,2930) 4562,3074 4566,3078 ; v1@4603.65,3150.66 4603.65,3086.35 4612,3078 ; v1(4611,3744) 4611,3847 4655,3891 4655,4003 v3(4656,4004) ; v1@4814,4105 4815,4104 v1(5225.5,4104) ; v1(5088.46,3477.66) 5089.34,3477.66 5173,3394 v1(5231,3394) 5231,3349 v1(5413,3167)
  Top Layer w15: J2.6 5150,3791 5274,3791 ; v1(5274,3571) 5274,3679 ; v1@5292,3886 5274,3868 5274,3791 ; v1(5413,3167) 5598,3167 5626,3195 5626,3646 5593,3679 5477.5,3679 5274,3679 ; 5274,3679 5274,3791
  Top Layer w25: v3(4438.42,3078) 4566,3078 4612,3078 4865,3078 ; J1.SHLD1 4859.83,3072.83 4865,3078 ; JP2.12 5416.29,2922 v2(5259.64,3078.64) 5259,3078 4865,3078
  Bottom Layer w8: v3(3733,3106) 3759,3132 4007.54,3132 C2.1 ; C23.1 v1(3887.54,3869.3) 3887.54,3764.46 3928,3724 4024,3724 4038,3710 4038,3660 4027.84,3649.84 3980.35,3649.84 IC1.5 3979.26,3648.75 IC1.5@3978.82,3648.31 ; J4.2 3931.2,2910.49 3931.2,2881.8 v1(3947,2866) ; C16.1 3985.48,3555.37 4019.85,3521 4073.48,3521 C12.1@4105.86,3488.63 ; L1.2 4094.67,3458.17 4094.67,3477.44 C12.1@4105.86,3488.63 ; C22.1 4078,3904.37 v1(4078,3869) ; v1(4110,2818) 4111.34,2819.34 4122.13,2819.34 4131.79,2829 IC2.5 ; C12.1 C12.1@4105.86,3488.63 ; C1.1 4182.56,3485.06 U4.12 ; C21.1 4197,3905.37 v1@4197,3870 ; C11.1 4364.93,3755.54 4413.67,3706.79 U4.18 ; R15.1 4365.63,4065.8 4379,4079.17 v1(4379,4080) ; U4.63 4413.67,3143.17 4438.37,3118.46 C7.1 ; D1.A 4462.39,4101.61 4462.39,4080.39 v1(4462,4080) 4462,4023 4471,4014 4471.91,4014 4476.91,4009 *1.4 ; R13.1 4563.31,3110.32 4602.31,3149.32 4602.31,3151.66 v1(4603.65,3153) ; v1(4562,2930) 4562.43,2930.43 4562.43,2960.72 J1.GND@4562.86,2961.15 ; U4.28 4610.52,3677.6 4640.91,3707.99 C5.1 ; v1(4611,3744) 4632.55,3744 4639.93,3736.63 ; C9.1@4639.66,3772.66 4639.66,3774.21 C9.1 ; v3(4656,4004) 4656,4056 v1@4679.5,4079.5 ; v1(4680,4080) v1@4679.5,4079.5 ; 4796.42,3110.35 4796.42,3013.58 4816.8,2993.2 J1.GND@4816.8,2961.15 ; R16.1 4812,4038.41 4812,4113 4791,4134 4708.82,4134 4678.79,4103.97 D2.A 4679.39,4101.39 4679.39,4079.61 v1@4679.5,4079.5 ; U1.20 5048.69,3540.38 5044,3535.69 5044,3511 5061.02,3493.98 5066.02,3493.98 ; v1(5088.46,3477.66) 5082.34,3477.66 5066.02,3493.98 ; U1.18 5066.02,3493.98 ; R32.1 5163.37,4007.46 5193,4037.09 5193,4090 5207,4104 v1(5225.5,4104) 5244,4104 5259,4089 5259,4039.84 5291.37,4007.46 R27.1 ; C14.2@5191.87,3373.5 5198.34,3373.5 5208.88,3384.04 5221.04,3384.04 v1(5231,3394) ; U1.9 5220.09,3571.81 5273.19,3571.81 v1(5274,3571)
  Bottom Layer w15: JP1.2 3820,3922 ; v1(3820,3869) 3820,3922 ; J3.2 3886.62,4048.62 3820,3982 3820,3922 ; R26.1 4074.37,3976.46 4066.69,3984.15 4060.22,3984.15 4041,4003.37 4041,4075 4171,4205 jp3.12 ; AMS1.1 5030,3095.61 5046.97,3078.64 5126,3078.64 ; L5.2 5127.5,3080.15 5126,3078.64 ; C24.1 5292,3939.37 v1(5292,3887) ; L3.2 5591.5,3167 v1(5413,3167) 5376,3167 5287.64,3078.64 v2(5259.64,3078.64) 5126,3078.64
  Bottom Layer w25: S1.1 3895.76,3613.8 3930.28,3648.31 IC1.5@3978.82,3648.31 ; C16.1 3979.26,3555.63 IC1.5@3979.26,3648.75 ; C18.1 C2.1 C17.1 C3.1 C4.1@4221.24,3121.54 ; C22.1 R26.1 ; C12.1 C1.1 ; C21.1 R25.1 ; L4.2 4218.74,3076.25 4218.74,3119.04 C4.1@4221.24,3121.54 ; C4.1 C4.1@4221.24,3121.54 ; C11.1 C13.1 4364.93,3830.48 4316.06,3879.34 4316.06,3905.31 C25.1 R31.1 4313.62,3969.75 4365.38,3969.75 R15.1 ; C7.1 C7.1 v3(4438.42,3078) 4438.42,3043.04 R2.1 ; C9.1@4639.66,3772.66 4639.93,3772.39 4639.93,3736.63 4639.93,3715.44 C5.1 ; R14.1@4761.87,3110.35 4796.42,3110.35 C19.1@4830.98,3110.35 ; J1.GND@4816.8,2961.15 4816.8,2954.65 4817.49,2953.96 4857.06,2953.96 4859.83,2951.19 J1.SHLD1 ; J2.8 J2.6 ; C6.1 4914.13,3373.5 C14.2@5191.87,3373.5 ; L5.2@5123.99,3131.51 C20.1 ; C26.1 R32.1 ; C24.1 R27.1
  other v1: 4812,4104
GND_motor: JP2.8 Q1.3 | length 122.7
  Bottom Layer w8: Q1.3 5674.39,3401 5750,3325.39 JP2.8
I2C2_SCL: R3.2 U1.23 U4.29 | length 547.9
  Bottom Layer w8: U4.29 4630,3642.34 4630,3610 4654,3586 4821,3586 4887,3520 4943.9,3520 4977.52,3553.63 R3.2 4990.46,3553.63 5024.46,3587.62 U1.23
I2C2_SDA: R4.2 U1.24 U4.30 | length 512
  Bottom Layer w8: U4.30 4649.89,3616.11 4662.63,3603.37 4915,3603.37 ; R4.2 4915,3554.63 4915,3603.37 ; U1.24 4915,3603.37
INT: U1.12 U4.33 | length 598.1
  Bottom Layer w8: U4.33 4817.2,3563.8 4871,3510 4871,3465 4897,3439 5190,3439 5220,3469 U1.12
IO_24_PC4: jp3.7 U4.24 | length 624.1
  Top Layer w8: v1(4559,3717) 4559.66,3717.66 4559.66,3855.66 4591,3887 v1(4591,3888)
  Bottom Layer w8: U4.24 4531.78,3689.78 v1(4559,3717) ; v1(4591,3888) 4591,4129 jp3.7
IO_25_PC5: jp3.6 U4.25 | length 698.6
  Top Layer w8: v1@4585,3717.67 4585,3855 v1(4618,3888)
  Bottom Layer w8: U4.25 4551.46,3678.46 4584.5,3711.5 v1@4584.5,3717.5 ; v1(4618,3888) 4618,4127 4653,4162 4722.63,4162 4769.63,4209 jp3.6
  other v1: 4585.5,3717.5
IO_26_PB0: JP2.2 U4.26 | length 1356.7
  Top Layer w8: v1(4585,3684) 4840,3939 5299,3939 v1(5351,3887)
  Bottom Layer w8: U4.26 4571.15,3670.15 v1(4585,3684) ; v1@5351,3885 v1@5353,3887 ; v1(5351,3887) v1@5353,3887 ; JP2.2 5715,3887 v1@5353,3887
IO_27_PB1: JP2.3 U4.27 | length 1411.4
  Top Layer w8: v1(4726,3652) 4726,3565 v1(4727,3564)
  Bottom Layer w8: U4.27 4590.83,3617.17 4644,3564 v1@4728,3564 ; v1(4726,3652) 4865,3791 5221,3791 5298,3868 5714,3868 5750,3832 JP2.3
IO_40_PC9: JP2.10 U4.40 | length 1113.7
  Top Layer w8: v1(4808,3425) 5075,3425 5385,3115 v1(5398,3115)
  Bottom Layer w8: U4.40 4768.33,3425.67 4807.33,3425.67 v1(4808,3425) ; v1(5398,3115) 5399.34,3116.34 5744.34,3116.34 JP2.10
IO_50_PA15: JP1.3 U4.50 | length 1306.7
  Top Layer w8: v1(3899,3679) 4223,3355 v1(4373,3355)
  Bottom Layer w8: JP1.3 3756,3822 v1(3899,3679) ; v1(4373,3355) 4609,3355 4669.57,3294.43 U4.50
IO_51_PC10: JP1.4 U4.51 | length 1223.4
  Top Layer w8: v1(3931,3531) 4136,3326 v1(4373,3326)
  Bottom Layer w8: JP1.4 3877,3531 3923,3531 ; v1(4373,3326) 4594,3326 4649.89,3270.11 U4.51
IO_52_PC11: JP1.5 U4.52 | length 1150
  Top Layer w8: v1(3931,3490) 3932,3490 4123,3299 4372.5,3299 v1(4373,3298.5)
  Bottom Layer w8: JP1.5 3818,3490 3922,3490 ; v1(4373,3298.5) 4373.5,3298 4583,3298 4630.2,3250.8 U4.52
IO_53_PC12: JP1.6 U4.53 | length 1087.1
  Top Layer w8: v1(3931,3346) 4006,3271 v1(4373,3271)
  Bottom Layer w8: JP1.6 3689,3522 3824,3387 3890,3387 v1(3931,3346) ; v1(4373,3271) 4572,3271 4610.52,3232.48 U4.53
IO_54_PD2: JP1.7 U4.54 | length 1028.6
  Top Layer w8: v1(3881,3303) 3948,3236 v1(4340,3236)
  Bottom Layer w8: JP1.7 3805,3303 v1(3881,3303) ; v1(4340,3236) 4352.5,3248.5 4561.5,3248.5 4590.83,3219.17 U4.54
IO_55_PB3: JP1.9 U4.55 | length 969.7
  Top Layer w8: v1@3923,3178 v1(3926,3178) 4246,3178 4259,3191 4530,3191 v1@4568.55,3152.45 ; v1@4569.11,3153 v1(4571,3153)
  Bottom Layer w8: JP1.9 3686,3212 3720,3178 v1(3926,3178) ; v1(4571,3153) 4571.08,3153.08 4571.08,3189.71 U4.55
IO_56_PB4: JP1.8 U4.56 | length 960.9
  Top Layer w8: v1(3926,3209) 4531,3209 v1(4552,3230)
  Bottom Layer w8: JP1.8 3799,3209 v1(3926,3209) ; U4.56 4551.73,3190.05 4551.73,3228.73 v1@4552,3229
IO_57_PB5: JP1.10 U4.57 | length 912.3
  Top Layer w8: v1(4255.7,3155) 4273.7,3173 4512,3173 v1@4532,3153
  Bottom Layer w8: JP1.10 3719,3155 v1(4255.7,3155) ; U4.57 4531.89,3189.67 4531.89,3153.11 v1@4532,3153
  other v1: 4532,3153.17
LED: R1.2 U4.8 | length 78.6
  Bottom Layer w8: R1.2 4248.63,3419.54 4261.84,3406.32 U4.8
LED_RGB: JP2.11 U4.41 | length 1223.8
  Top Layer w8: v1(4727,3407) 4728,3406 5060,3406 5397,3069 v1(5398,3069)
  Bottom Layer w8: v1(4727,3407) 4727.35,3406.65 4767.67,3406.65 U4.41 ; v1(5398,3069) 5703,3069 JP2.11
Net*1_2: *1.2 R12.1 R15.2 | length 137.9
  Bottom Layer w8: R12.1@4432.37,3908.99 4432.37,3970.26 R15.2@4432.63,3970.51 ; R12.1@4432.38,3909 *1.2
Net*1_6: *1.6 R7.1 R16.2 | length 225.5
  Bottom Layer w8: *1.6 4806.06,3959 4872.6,4025.54 R16.2 R7.1
NetC3_2: C3.2 U4.4 Y3.1 | length 323.3
  Bottom Layer w8: C3.2 4154,3229.87 4123.12,3260.75 Y3.1 4123.12,3292.25 4158.45,3327.58 U4.4
NetC4_2: C4.2 U4.3 Y3.2 | length 204.1
  Bottom Layer w8: C4.2 4222,3276.04 Y3.2 4221.54,3292.21 4237.23,3307.89 U4.3
NetC9_2: C9.2 U4.31 | length 148.8
  Bottom Layer w8: U4.31 4669.57,3730.65 4707.91,3768.99 C9.2
NetC10_2: C10.2 U4.47 | length 251.4
  Bottom Layer w8: U4.47 4818.21,3288.21 4870,3340 4943.91,3340 4977.54,3306.37 C10.2
NetC14_1: C14.1 U1.10 | length 354.9
  Bottom Layer w8: C14.1 5234.63,3306.63 5277,3349 5277,3536 5256.87,3556.13 U1.10
NetJ1_A5: J1.A5 R14.2 | length 91.6
  Bottom Layer w8: J1.A5 4740.69,2962.79 4740.69,2986.06 4761.84,3007.21 R14.2
NetJ1_A6: J1.A6 J1.B6 R8.1 | length 179.1
  Bottom Layer w8: J1.B6 4662.21,2959.24 4662.21,2936.79 4670,2929 4693,2929 4699.13,2935.13 4699.13,2960.6 J1.A6 4699.67,3037.39 R8.1
NetJ1_A7: J1.A7 J1.B7 R11.1 | length 332.7
  Bottom Layer w8: R11.1 R11.1@4631.63,3043.57 ; J1.A7 4679.99,2995.21 R11.1@4631.63,3043.57 ; J1.B7 4719.36,2994.36 4728,3003 4728,3067 4718,3077 4665.06,3077 R11.1@4631.63,3043.57
NetJ1_B5: J1.B5 R13.2 | length 112.5
  Bottom Layer w8: R13.2 4563.31,3043.32 4574.49,3032.14 4574.49,3029.51 4619.03,2984.97 4619.03,2963.05 J1.B5
NetL1_1: L1.1 R1.1 | length 56.1
  Bottom Layer w8: L1.1 R1.1
NetL2_1: L2.1 R10.1 | length 86.8
  Bottom Layer w8: R10.1 5597.88,3585.63 L2.1
NetL2_2: L2.2 Q1.1 | length 66.2
  Bottom Layer w8: L2.2 5661.5,3519.5 Q1.1
NetL3_1: L3.1 U3.3 | length 191.3
  Bottom Layer w8: U3.3 5643.71,3332 5673,3302.71 5673,3185.5 L3.1
NetL4_1: L4.1 R22.2 | length 65.7
  Bottom Layer w8: R22.2 4152.13,3072.63 L4.1
NetL5_1: L5.1 R23.2 | length 57.1
  Bottom Layer w8: R23.2@5190.5,3182.35 R23.2
  Bottom Layer w25: L5.1 5191.25,3128.76 5191.25,3181.6 R23.2@5190.5,3182.35
NetR7_2: R7.2 VR1.1 VR1.2 | length 558.5
  Top Layer w8: v1@4992,4072 v1@4993.34,4073.34 ; v1@4993.34,4074 v1(5350,4074)
  Bottom Layer w8: R7.2 4992,4034.28 v1@4992,4072 ; v1(5350,4074) VR1.2@5372,4074 ; VR1.2@5399,4048 VR1.2 5401.97,4049 5439.37,4011.6 VR1.1
  other v1: 4992,4074
NetR9_1: R9.1 U2.2 | length 410.7
  Bottom Layer w8: R9.1 5358.54,3652.37 5347.35,3663.56 5331,3679.91 5331,3730 5349,3748 5577.99,3748 5607.99,3718 U2.2
NetR10_2: R10.2 U2.3 | length 180.6
  Bottom Layer w8: U2.3 5474,3718 5494.34,3697.66 5494.34,3663.81 5505.53,3652.63 R10.2
NetR12_2: R12.2 VR2.1 VR2.2 | length 1536.5
  Top Layer w8: v1@4376,3873.23 4376,4038 4391,4053 v1(5461,4053)
  Bottom Layer w8: R12.2@4364,3906.62 R12.2 ; v1(4376,3870) R12.2@4376,3901.37 ; v1(5461,4053) 5567,4053 VR2.2 5572.97,4049 5610.37,4011.6 VR2.1
NetR18_1: R18.1 U3.2 | length 292.1
  Bottom Layer w8: U3.2 5376.22,3332 5369,3339.22 5369,3523.1 5431.53,3585.63 R18.1
OSC_IN: C17.2 U4.5 Y2.1 | length 452.4
  Bottom Layer w8: Y2.1 Y2.1@4013.58,3258.72 ; C17.2@4070.31,3199.46 4070.31,3201.98 Y2.1@4013.58,3258.72 ; C17.2@4072,3199.46 C17.2@4083,3188.46 ; U4.5 4110.26,3347.26 4039.38,3276.38 4031.23,3276.38 Y2.1@4013.58,3258.72
OSC_OUT: C2.2 U4.6 Y2.3 | length 678.3
  Bottom Layer w8: Y2.3 3867.92,3349.28 3913.2,3304 3937,3304 ; C2.2 4007.61,3198.85 3971.15,3198.85 3937,3233 3937,3304 ; U4.6 4101.95,3366.95 4039,3304 3937,3304
RE_485_CH1: IC2.2 U4.62 | length 451.8
  Bottom Layer w8: IC2.2@4342.48,2931.99 4325.01,2931.99 4299,2958 4299,3159 4369,3229 4423,3229 4433.35,3218.65 U4.62
RE_485_CH2: IC1.2 U4.14 | length 443.8
  Bottom Layer w8: IC1.2 4136,3749 4094,3707 4094,3613 4119,3588 4210,3588 4273.57,3524.43 U4.14
RESET: C16.2 J2.1 R6.2 S1.2 U4.7 | length 1793.1
  Top Layer w8: v1(4373,3386) 4373,3431 4864,3922 5119,3922 J2.1
  Bottom Layer w8: S1.2 S1.2@3895.76,3427.2 ; R6.2 3956.56,3488 S1.2@3895.76,3427.2 ; v1(4373,3386) 4372.69,3386.32 4315.56,3386.32 U4.7 3936.34,3386.63 S1.2@3895.76,3427.2
SWCLK: J2.3 U4.49 | length 935.6
  Top Layer w8: v1(4689.59,3229.59) 4689.59,3294.41 4668,3316 4668,3676 4880,3888 4954,3888 J2.3
  Bottom Layer w8: U4.49 4689.59,3190.11 v1(4689.59,3229.59)
SWDIO: J2.4 U4.46 | length 782.4
  Top Layer w8: v1(4809,3309) 4734,3309 4686,3357 4686,3669 4860,3843 J2.4
  Bottom Layer w8: U4.46 4768.33,3308.22 4808.22,3308.22 v1(4809,3309)
USART1_RX: IC2.1 U4.59 | length 331.4
  Bottom Layer w8: IC2.1@4343.49,2983 IC2.1@4346.48,2985.99 ; IC2.1 4459,2979 4492.08,3012.08 4492.08,3189.45 U4.59
USART1_TX: IC2.4 U4.58 | length 457.4
  Bottom Layer w8: IC2.4@4343.49,2833 4396,2833 4424,2861 4424,2922 4512.09,3010.09 U4.58
USART2_RX: IC1.1 U4.17 | length 508.5
  Top Layer w8: v1(4113,3798) v1(4293,3798)
  Bottom Layer w8: v1(4113,3798) 4113.5,3798.5 4167.99,3798.5 IC1.1 IC1.1@4199.98,3799 ; v1(4293,3798) 4293,3684 4318.78,3658.23 4393.65,3658.23 4393.98,3657.9 U4.17
USART2_TX: IC1.4 U4.16 | length 157
  Bottom Layer w8: IC1.4@4194,3649 IC1.4@4195.76,3649 ; IC1.4@4194.88,3648.12 4279.2,3563.8 U4.16
V_USB: D4.1 J1.VBUS1 | length 279.3
  Bottom Layer w15: J1.VBUS1 4786.29,2895 4823.29,2858 D4.1@4980.42,2858 ; D4.1@4980.42,2834 D4.1
Vin: AMS1.3 C18.2 C19.2 C23.2 D3.2 D4.2 IC1.8 IC2.8 JP2.1 jp3.1 R5.2 R22.1 | length 5628
  Top Layer w15: v2(5666,2974) 5666,3941.86 JP2.1
  Top Layer w25: v2(3954.46,3851) 3814,3710.54 3814,3156 v2(4019,2951)
  Bottom Layer w15: IC2.8 4168.83,2977.68 4223.32,2977.68 4253,2948 4253,2846 4307,2792 4456,2792 4494,2830 4877,2830 4945,2762 5281,2762 ; D3.2 5160.5,3008.58 5281,2888.08 5281,2762 ; v2(5666,2974) 5666,2880 5548,2762 5281,2762
  Bottom Layer w25: R5.2 3951.38,3003 3998.45,3003 3998.49,3003.04 4015.5,3003.04 C18.2 ; C23.2 v2(3954.46,3851) 3954.46,3799.69 3955.15,3799 IC1.8 ; v2(4019,2951) 4019,3003.04 4021.5,3005.54 4022.69,3005.54 4025.23,3003 4084.37,3003 R22.1 4089.68,3002.94 4113.45,3002.94 4137.39,2979 IC2.8 ; C19.2 4913,3043.37 ; AMS1.3 4912,3044.37 4913,3043.37 ; D3.2 D4.2 4975.5,3008.58 4940.71,3043.37 4913,3043.37 ; jp3.1 5566.43,4209.14 JP2.1
pads on no net: D1.0 D2.0 J1.A8 J1.B8 J1.SHLD2 J1.SHLD3 J1.SHLD4 J1.VBUS2 J3.NC1 J3.NC2 J4.NC1 J4.NC2 U1.2 U1.3 U1.4 U1.5 U1.6 U1.7 U1.14 U1.15 U1.16 U1.17 U1.19 U1.21 U1.25 U4.1 Y2.2 Y2.4

## Keep-outs
Keep-Out Layer:
  the board outline again, w5